# Altium PCB PCB1.PcbDoc (part 2 of 3)
Units mm, origin at the board's own origin, x right, y up, seen from the top; angles counter-clockwise.
Board outline 395.86 x 234.82 mm, 2 copper layers (Top Layer, Bottom Layer); 284 components, 215 nets, 949 pads, 803 vias.
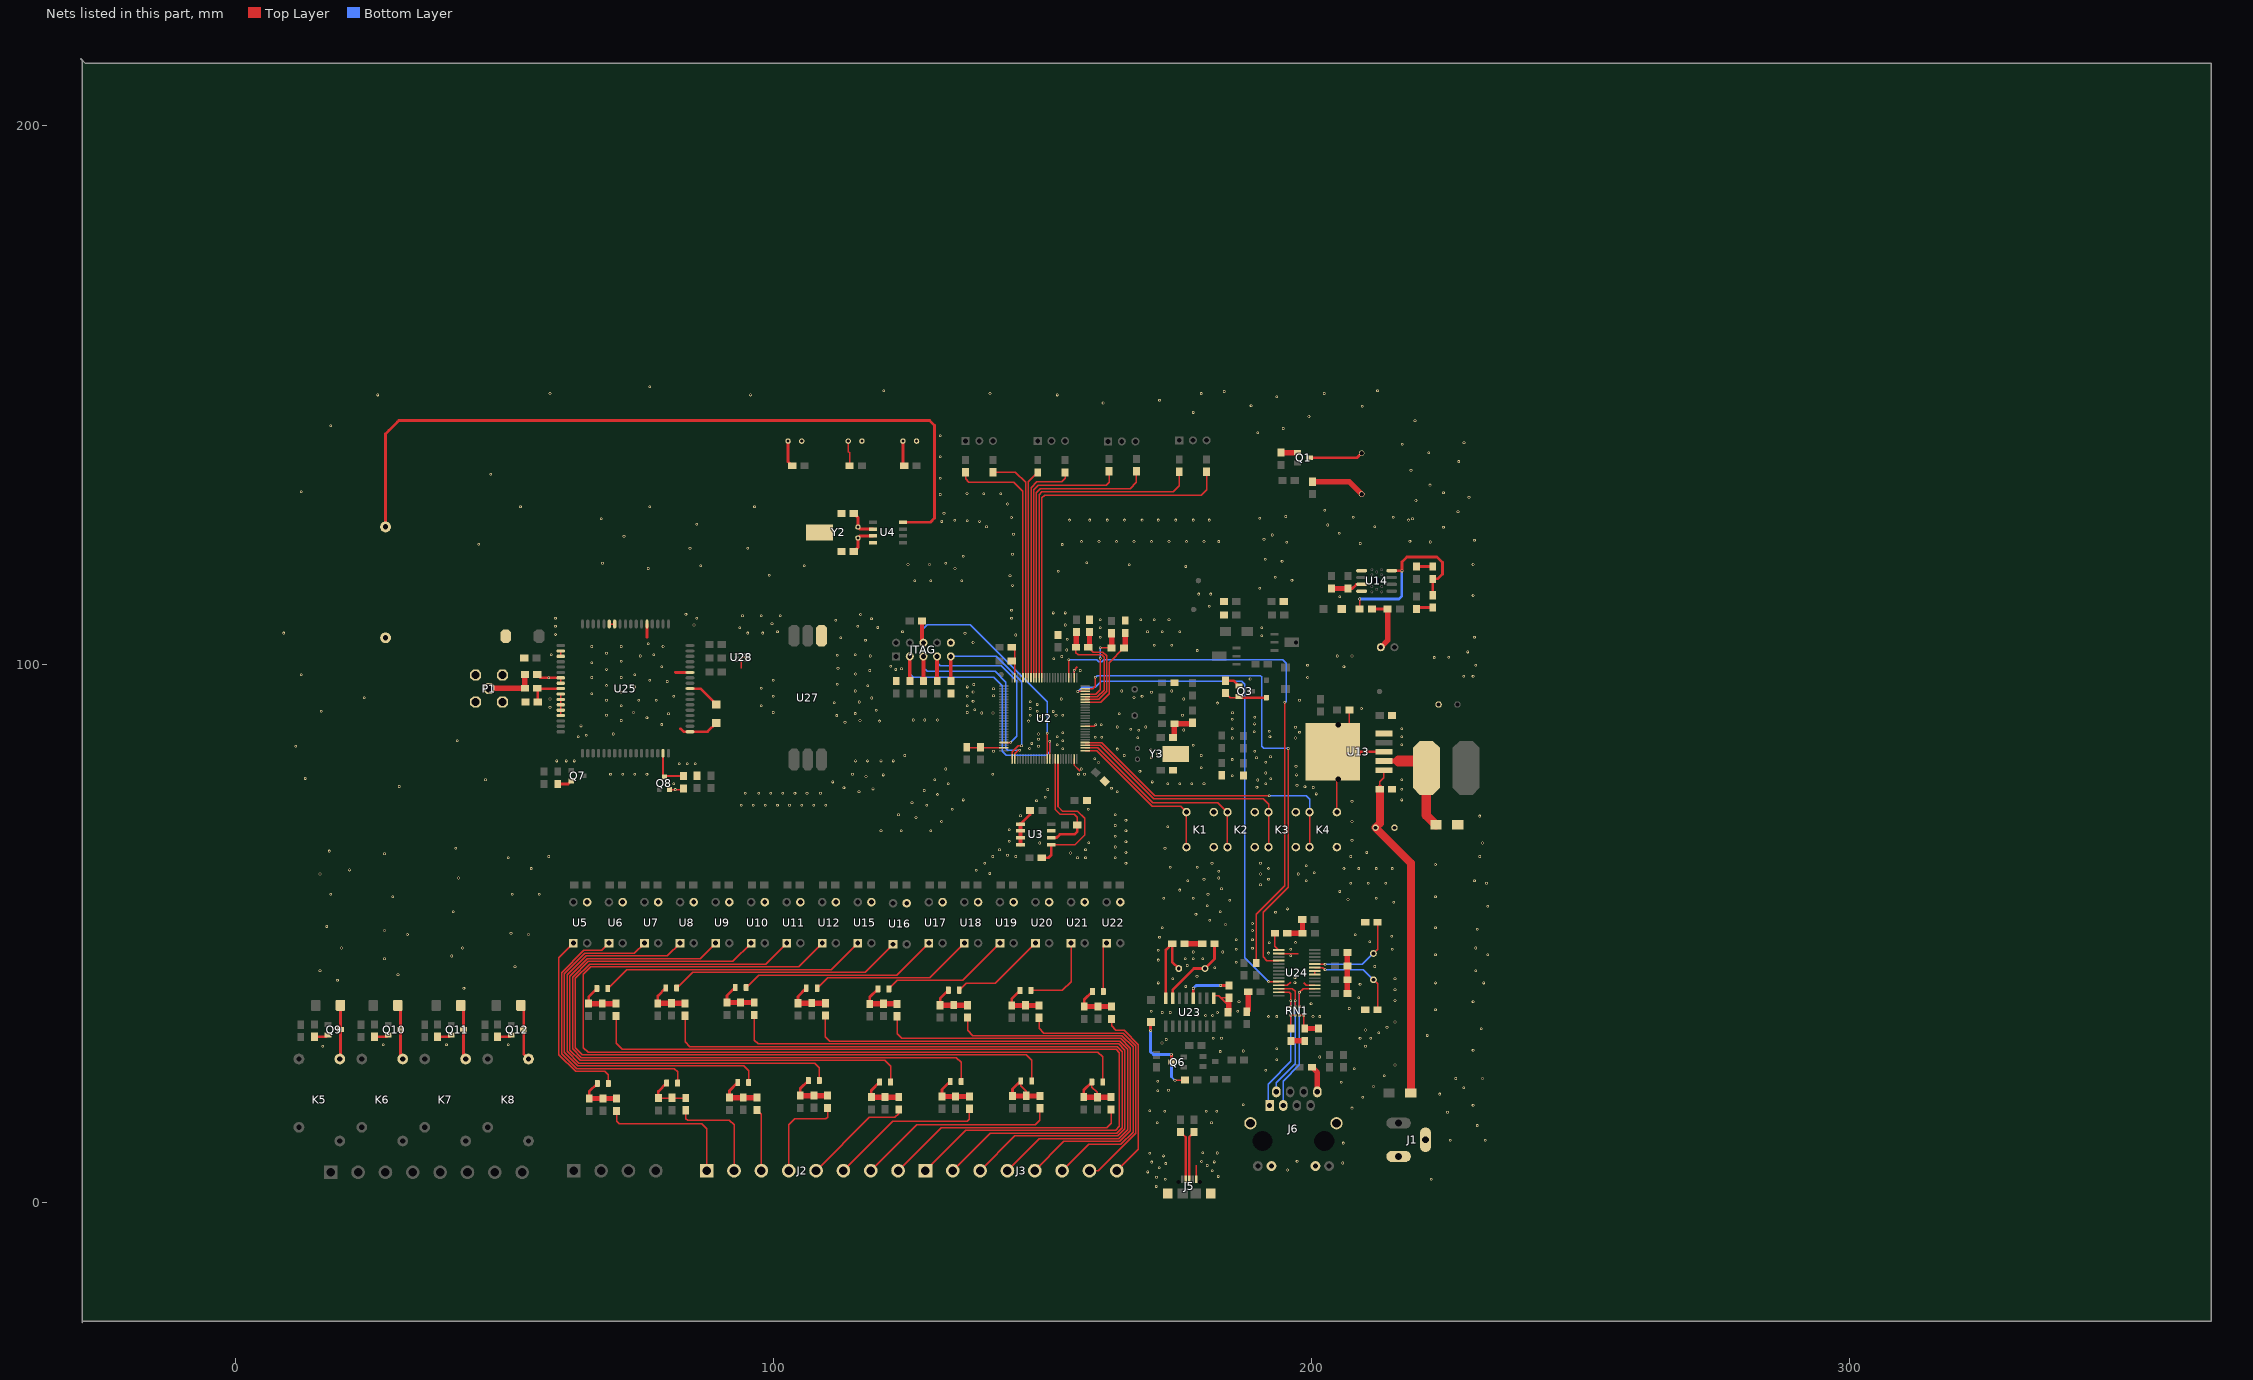
[diagram p2: the nets of this part, all layers, seen from the top]

## Via types
v1: diameter 0.5, hole 0.3, Top Layer to Bottom Layer, tented both sides, 771 vias
v2: diameter 0.7, hole 0.5, Top Layer to Bottom Layer, tented both sides, 29 vias
v3: diameter 1, hole 0.7, Top Layer to Bottom Layer, tented both sides, 3 vias

## Nets (pads, with @x,y where several pads share a name; then routed paths per layer and width w, separated by ;. In a path a pad name is that pad's centre, name@x,y a point inside that pad or via, vN(x,y) a via of type N, cw(c..) or ccw(c..) an arc to the next point about the centre after c; other vN are vias at no path point) (continued)
GND: BAT1.2 C1.2 C2.2 C3.1 C4.1 C7.1 C9.2 C10.2 C11.1 C12.1 C13.2 C14.1 C15.2 C16.2 C17.2 C18.1 C19.2 C20.1 C21.1 C22.2 C23.1 C24.2 C25.2 C26.2 C27.2 C28.2 C29.2 C30.1 C31.1 C32.1 C33.2 C34.1 C35.2 C36.2 C37.2 C38.2 C39.1 C40.2 C41.2 C42.2 C43.2 C65.2 C66.2 C67.2 C68.2 C69.1 C70.1 C71.1 C72.1 C73.1 D12.1 D25.2 D26.2 D27.2 J1.2 J1.3 J4.2 J5.0@173.252,1.624 J5.0@181.252,1.624 J5.5 J6.8 J6.10 J6.11 J6.13 J6.14 JTAG.10 K1.1 K2.1 K3.1 K4.1 L1.1 L4.1 LED5.2 P1.2 P1.3 P1.4 P1.5 Q1.1 Q3.1 Q7.1 Q8.1 Q9.2 Q10.2 Q11.2 Q12.2 R2.2 R6.2 R8.1 R9.2 R21.1 R52.2 R53.2 R73.1 R82.1 R83.1 R90.2 R92.1 R93.1 U2.10 U2.27 U2.49 U2.74 U2.99 U3.1 U3.2 U3.3 U3.4 U3.7 U4.4 U5.3 U6.3 U7.3 U8.3 U9.3 U10.3 U11.3 U12.3 U13.3 U13.5 U13.6 U13.7 U13.8 U14.1 U14.3 U15.3 U16.3 U17.3 U18.3 U19.3 U20.3 U21.3 U22.3 U23.1 U24.2 U24.11 U24.18 U24.21 U24.22 U25.18 U25.29 U25.39 U25.45 U25.46 U25.53 U25.54 U25.58 U25.59 U25.61 U25.62 U25.63 U25.64 U25.65 U27.3 U28.2 Y2.3 Y3.3 | length 198.7
  Top Layer w0.254: U25.65@60.508,90.432 U25.64@60.508,91.432 U25.63@60.508,92.432 U25.62@60.508,93.432 U25.61@60.508,94.432 ; U25.59@60.508,96.432 60.503,96.432 60.503,97.432 U25.58@60.508,97.432 ; U25.54@60.508,101.432 U25.53@60.508,102.432 ; U25.46@69.508,107.432 U25.45@70.508,107.432 ; Q8.1@80.69,76.676 83.072,76.676 C32.1@83.296,76.9 C32.1@83.488,76.9 ; U25.18@84.506,87.432 U25.18@84.508,87.432 ; 94,99.25 94,101 94.234,101.234 U28.2@94.98,101.234 ; U27.3@108.926,105.264 U27.3@108.926,105.283 ; C4.1@112.656,120.879 C4.1@112.656,120.884 ; R6.2@132.98,94.554 R6.2@132.994,94.554 ; C73.1@135.915,84.531 C73.1@136.003,84.619 ; C72.1@144.272,103.124 144.868,102.528 U2.49@144.868,97.466 ; U2.27@155.868,97.466 v1(155.868,98.868) 156.5,99.5 ; C7.1@177.848,89.091 C7.1@178.304,89.091 ; J5.5@178.552,4.42 J5.5@178.552,4.299 178.552,6.901 ; U23.1@181.797,37.892 181.797,38.329 182.779,38.329 183.107,38 ; 184.531,36.576 183.864,37.244 183.107,38 ; C39.1@184.62,38 183.107,38 ; C31.1@187.86,35.292 C31.1@187.96,35.392 ; U24.11@193.916,40.312 195.512,40.312 196.1,40.9 ; U24.2@193.916,46.214 197.486,46.214 ; 198.5,40.8 198.988,40.312 U24.18@200.616,40.312 ; U24.21@200.616,42.314 U24.22@200.616,42.964 ; K4.1@204.688,72.484 204.688,78.303 U13.6@204.978,78.593 ; U13.8@204.978,88.753 204.978,86.724 203.928,85.674 U13.7@203.928,83.692 ; LED5.2@207.01,91.44 207.01,83.692 U13.7@203.932,83.692 ; U13.7@207.4,81.2 207.4,81.204 207.391,81.195 207.391,81.006 207.003,80.617 U13.6@204.978,78.593 ; 209.05,83.15 209.05,83.688 209.05,83.692 209.05,83.794 210.13,83.794 210.236,83.688 211.607,83.688 ; U13.7@203.928,83.692 U13.7@203.932,83.692 ; U13.7@203.928,83.692 203.928,79.642 U13.6@204.978,78.593 ; U13.7@203.928,83.692 U13.7@203.932,83.692 ; 211.607,83.688 U13.3@213.428,83.688 211.607,83.688 ; U14.3@209.296,114.808 209.55,114.808 U14.3@209.296,114.808
  Top Layer w0.3: C73.1@135.915,84.531 136.031,84.416 U2.74@142.818,84.416 ; U2.99@155.868,82.366 155.868,81.232 156.9,80.2 ; U2.10@157.918,88.416 159.616,88.416 v1(159.9,88.7)
  Top Layer w0.5: C65.2@14.732,30.734 16.891,30.734 Q9.2@17.272,31.115 ; C66.2@25.908,30.734 28.067,30.734 Q10.2@28.448,31.115 ; C67.2@37.592,30.734 39.751,30.734 Q11.2@40.132,31.115 ; C68.2@48.768,30.734 50.927,30.734 Q12.2@51.308,31.115 ; C33.2@56.118,98.044 56.73,97.432 60.503,97.432 U25.58@60.508,97.432 ; R92.1@59.928,77.724 61.862,77.724 Q7.1@62.436,78.298 ; 76.5,105 76.508,105.008 U25.39@76.508,107.432 ; 81.75,98.5 81.818,98.432 U25.29@84.508,98.432 ; 82.75,88 83.318,87.432 U25.18@84.508,87.432 87.797,87.432 C35.2@89.392,89.027 ; U3.1@145.924,70.27 147.702,72.048 C9.2@147.702,72.81 ; R83.1@183.98,96.906 185.504,96.906 Q3.1@186.52,95.89 ; U13.7@203.932,83.692 203.932,83.688 209.05,83.688 210.236,83.688 211.607,83.688 U13.3@213.428,83.688 ; R53.2@206.756,114.046 207.546,114.046 208.308,114.808 U14.3@209.296,114.808 ; C15.2@211.201,110.236 C16.2@214.122,110.236
  Top Layer w0.7: U3.4@145.924,66.46 U3.3@145.924,67.73 U3.2@145.924,69 U3.1@145.924,70.27
  Top Layer w1: C12.1@174.244,86.36 174.498,86.614 C1.2@174.498,88.9 177.657,88.9 C7.1@177.848,89.091 ; C34.1@176.38,48.044 C40.2@179.682,48.044 ; C30.1@184.464,35.292 184.62,35.448 184.62,36.576 C39.1@184.62,38 ; C31.1@187.96,35.392 188.214,35.646 R90.2@188.214,39.116 ; R21.1@194.32,139.276 Q1.1@197.368,139.276 ; C29.2@195.478,49.984 C25.2@198.314,49.984 198.314,52.482 C23.1@198.272,52.524 ; C41.2@196.18,29.99 C42.2@198.72,29.99 ; C43.2@200.05,25.092 201.066,24.076 J6.8@201.066,20.52 ; R52.2@203.708,114.046 R53.2@206.756,114.046 ; C26.2@206.654,38.808 C19.2@206.654,41.348 C22.2@206.654,43.888 C24.2@206.654,46.428 ; J4.2@212.852,103.124 214.122,104.394 C16.2@214.122,110.236
  Bottom Layer w0.254: 155.868,98.118 v1(155.868,98.868) ; J1.2@216.154,8.509 J1.2@217.094,8.509 ; J1.3@220.194,11.609 J1.3@221.154,11.609
  other v1: 171.12,2.946 222.25,4.25 172.796,4.267 171.171,4.648 182.626,4.801 169.545,5.639 181.534,5.867 195.5,6 171.679,6.401 180.594,6.833 172.898,7.188 205.8,7.3 170.282,7.468 181.915,7.493 179.553,7.569 197.3,7.6 172.466,8.611 169.951,9.093 182.474,9.144 179.756,9.22 205.9,11 225.75,11.5 232.25,11.5 230.75,14.25 171.3,14.8 181.4,14.8 225.25,16.75 172.7,16.9 180.4,16.9 182.4,16.9 169.9,17 207.5,17.5 230,18 187.3,18.1 209.5,19.5 223.8,20.1 171.4,20.7 173.4,20.8 228.25,21.25 211.5,21.5 205.5,22.3 171.4,22.5 226.75,23 231.75,23 213.5,23.5 191.5,24.5 207.9,24.8 215.5,25.5 193.5,26.5 201.5,27 183,28 187.3,28.1 230,28.25 193.5,28.5 16.25,29 210,29 27.5,29.25 39.25,29.25 50.75,29.25 172.2,29.6 173,30.25 181.75,30.5 183.25,30.5 209,30.5 211,30.5 221.5,31 212.5,31.5 210,32 231.5,32.25 214,32.5 215.5,33.5 192,34.5 193.5,34.5 200.25,34.5 201.5,34.5 178.9,34.7 180.3,34.7 181.6,34.7 172.25,35.25 173.75,35.25 182.5,35.25 170.2,35.5 186.25,35.5 223,35.75 207,36 199.9,36.9 186.5,37.25 230,37.25 215.5,37.5 208.75,38 215.5,39.5 42.5,39.75 176.6,40.1 209,40.5 171.5,40.75 223,40.75 232,40.75 196.9,40.8 19,41.25 174.2,41.5 215.5,41.5 196.9,41.7 178.7,42 30.25,42.25 15.75,43 230.5,43 182,43.6 52,43.75 211.7,43.8 176.9,44 186,44.6 171.5,45 27.75,45.25 176.5,45.25 178,45.25 179.75,45.25 40.25,45.75 196.1,45.8 223,46 232.75,46 192,46.3 178,46.5 183.5,46.5 171.5,46.8 186,47 196.1,47 215,47 189,47.2 19.75,47.25 42.25,47.25 230.5,47.25 192.1,48.2 197,48.25 210.8,48.4 186,48.8 189,48.8 171.75,49.25 214.9,49.4 208.1,49.7 32,49.75 54.5,49.75 51.25,50 27.75,50.5 189,50.5 230.75,50.75 172.25,51 223,51 17,51.25 184,51.6 189,51.8 181.1,52.4 178.5,53.5 193.3,53.9 40.5,54 183,54 195.5,54.5 232.75,55 180.6,55.1 215.25,55.75 184.8,56.1 206.75,56.25 172.5,56.5 178,56.5 212,56.5 29.25,56.75 223,56.75 17.75,57.25 51.5,57.25 56.5,57.25 180.75,57.25 205.25,57.75 175.5,58 183.25,58.25 190.5,59 207.25,59.25 210.5,59.25 213.75,59.25 232.5,59.25 177,59.75 199,59.75 230.25,59.75 180,60 192,60 41.5,60.25 182.75,60.25 15.75,61 190.5,61 197.5,61 140.2,61.1 200.5,61.25 182.75,61.5 137.7,61.7 21.25,61.75 55,62 192,62 206,62 208.75,62 212,62 215,62 173.75,62.25 178.75,62.25 199,62.5 223,62.75 139.25,63 165.5,63 181.5,63 190.5,63 50.75,64 156.5,64 158,64 163.5,64 58.25,64.25 140.75,64.25 145,64.25 207.25,64.25 231.25,64.25 143.5,64.5 27.75,64.75 155.2,64.9 165.5,65 210.25,65 17.5,65.25 142,65.5 158,65.5 41,65.75 172.75,65.75 163.5,66 149.5,66.75 231.75,66.75 158.6,66.8 165.5,67 143.8,67.1 207.5,67.25 149.5,68 163.5,68 120,69 123.75,69 129.25,69 165.5,69 143.8,69.2 173.25,69.75 163.5,70 131.25,70.75 207.5,70.75 165.5,71 126.5,71.5 231.25,71.75 145.9,71.8 123.25,72 163.5,72 133.25,73 158.5,73 94,73.75 96.25,73.75 98.5,73.75 100.75,73.75 103,73.75 105.25,73.75 107.5,73.75 109.75,73.75 128.5,73.75 125.75,74.25 207.5,74.5 148.9,74.6 135.25,74.75 216.75,74.75 150.5,75.25 130.5,75.75 200.838,75.87 94.75,76 97.25,76 99.5,76 101.75,76 104,76 106.25,76 108.75,76 115.9,76.3 163.9,76.3 128,76.5 81.75,76.676 151,76.7 216.75,76.75 118.5,76.8 162.8,76.9 113.1,77 200.304,77.064 189.84,77.089 198.755,77.191 30.5,77.25 197.282,77.47 81.5,77.75 132.5,77.75 173.25,77.75 175.5,77.75 177.75,77.75 180,77.75 191.5,77.75 111,78.1 170.4,78.1 190.017,78.461 46.5,78.5 130,78.5 216.75,78.5 192.43,78.664 13,78.75 117.2,79.1 185.25,79.25 120.4,79.4 197.18,79.4 69.75,79.5 72,79.5 74.25,79.5 76.5,79.5 114.7,79.5 140.75,79.5 156.7,79.5 157.8,79.5 191.5,79.75 168.1,80.1 132,80.5 157.2,80.5 179.5,80.75 197.104,81.001 82.5,81.5 84,81.5 85.5,81.5 160.4,81.7 191.5,81.75 59.75,82 61.5,82 63,82 115.25,82 117.5,82 120,82 122.25,82 185.25,82.25 159.7,82.4 189.763,82.575 170.2,82.6 192.354,82.779 124.4,83 165.2,83 179.5,83 171.3,83.3 140.9,83.8 189.408,83.795 170.1,84.1 163.9,84.2 153.75,84.25 147.6,84.3 11.25,84.75 149.25,84.75 178,84.9 152.75,85 216.75,85 148,85.25 41.25,85.75 153.75,85.75 149.25,86 185.25,86.25 197,86.25 167.7,86.3 159.8,86.4 161,86.4 63.75,86.5 152.75,86.5 192.25,86.5 216.75,86.5 65.25,86.75 70.25,87 149.25,87 153.75,87.25 197.764,87.351 189.357,87.401 192.1,87.503 167.9,87.7 176.25,87.75 166.4,87.9 185.25,88 216.75,88 197,88.25 163.9,88.3 169.2,88.3 64.25,88.5 160.9,88.7 79.25,88.75 189.382,88.875 113.3,89.2 119.7,89.4 147.4,89.4 71.75,89.5 116.1,89.5 126,89.6 128.1,89.6 130.5,89.6 185.25,89.75 76.5,90 189.408,90.094 149.6,90.3 111.76,90.424 69,90.5 147.75,90.5 152.5,90.5 153.75,90.5 176,90.5 80.5,90.75 164.25,90.75 115.2,90.8 138.7,90.9 140.8,90.9 185.293,90.932 74,91 100,91 136,91 152,91.2 16,91.25 149,91.25 119.101,91.44 137.4,91.5 147.75,91.75 209.25,91.75 58.5,92 71.75,92.25 97.75,92.25 136,92.25 149,92.5 182.5,92.75 111.3,92.8 115.951,92.939 147.75,93 137.1,93.1 69,93.25 75,93.25 78.25,93.25 197.75,93.25 58.5,93.5 153.5,93.5 176.25,93.5 118.3,93.7 24,93.75 167,93.8 81.5,94 100,94 136,94 168.5,94 140.9,94.1 66.25,94.5 71.75,94.75 170.25,94.75 137.1,94.8 115.2,95 164.75,95 174,95 140.9,95.4 97.75,95.5 74.25,95.75 136,95.75 117.526,95.987 69,96 137.2,96.2 111.862,96.241 80.25,96.75 77,97 100,97 188.567,97.212 58.25,97.432 66.25,97.5 71.75,97.5 199.25,97.5 228.25,97.75 230,97.75 12.25,98 74.25,98 115.265,98.146 117.9,98.8 157,98.8 69,99 122.75,99 123.8,99.1 112,99.2 79.25,99.5 206,99.5 121.8,99.6 199.25,99.75 230.5,99.75 66.25,100.25 71.75,100.5 152.1,101 222.8,101.2 225.5,101.25 153.6,101.4 75.25,101.5 118,101.5 204.75,101.5 207.5,101.5 111.862,101.651 115.189,101.702 58.75,101.75 77.75,101.75 69,102 229,102.25 178.75,102.5 154.5,102.6 66.25,103.25 71.75,103.25 79.5,103.25 170.75,103.5 174,103.5 76.75,103.75 137.1,104 117.1,104.4 154.6,104.6 112.5,104.9 160.75,105 230.25,105 190.75,105.25 145,105.4 59.5,105.5 135.6,105.7 9,105.75 95.25,105.75 98,105.75 100.75,106 124,106 169.5,106 172.25,106 175.5,106 93.75,106.75 160.75,106.75 190.75,106.75 119.4,106.8 59.5,107 115.672,107.036 85.25,107.25 154.25,107.25 99.75,107.5 111.582,108.153 160.75,108.25 168.25,108.25 170.75,108.25 173.5,108.25 118.212,108.433 59.5,108.5 85.75,108.5 144.25,108.5 94.25,109 97.75,109 101.25,109 116.2,109.2 83.75,109.25 152,109.5 154.25,109.5 144.25,110 181,110.75 205.25,112.5 230,112.75 179,113 181.25,113 190.373,114.097 144.424,114.605 126.25,115.5 129.25,115.5 135,115.5 196.342,115.595 193.218,116.129 143.967,116.408 99.25,116.5 152.933,117.221 76.75,117.75 133.75,117.75 176.632,118.135 86.5,118.25 105.75,118.25 166.091,118.44 125,118.5 129,118.5 230,118.5 68.25,118.75 132,118.75 158.191,118.796 194.513,119.101 191.364,119.456 135.25,120 144.424,120.371 84.5,121.5 95.25,121.5 153.645,122.199 45.25,122.25 209.042,122.403 195.351,122.657 222.021,122.682 157.25,122.75 160.5,122.75 163.75,122.75 167,122.75 170.25,122.75 173.5,122.75 176.75,122.75 180,122.75 182.75,122.75 218.262,122.834 230.25,123 191.16,123.19 72.25,123.75 192.659,123.977 144.602,124.104 205.13,124.308 224.485,125.4 139.6,125.5 211.75,125.5 202.971,125.832 85.75,126 131.3,126.5 138.3,126.5 136,126.6 133.7,126.7 155,126.75 158.75,126.75 162,126.75 165.25,126.75 168.5,126.75 171.5,126.75 174.75,126.75 178,126.75 181,126.75 218,126.75 218,126.75 68,127 218.75,127 190.348,127.076 144.221,127.229 215.189,127.254 207.747,127.279 195.199,127.406 131.7,128 227.203,128.27 202.413,128.6 53,129.25 77,129.25 96.5,129.25 143.51,129.743 219.38,130.378 229.25,131 131,131.5 139.065,131.623 142.24,131.623 135.966,131.699 224.485,131.826 12.25,132 222,133.25 131,134.5 47.5,135.25 218.465,136.017 227.355,137.617 131,138.5 221.75,139.25 216.84,140.843 228.321,141.122 131,142.4 190,143 194.742,143.764 17.75,144.25 219.202,145.186 199.5,146 178,146.75 209.423,147.879 188.75,148 161.25,148.5 171.75,149 193.523,149.682 26.5,150 95.75,150 152.75,150 58.5,150.25 140.25,150.25 179.5,150.25 202.336,150.266 183.744,150.647 120.5,150.75 212.25,150.75 77,151.5
I2C1_SCL: R23.1 U2.92 U3.6 | length 22
  Top Layer w0.3: U2.92@152.368,82.366 152.368,72.981 153.238,72.111 155.88,72.111 156.464,71.526 R23.1@156.464,70.104
  Top Layer w0.5: U3.6@151.624,67.73 152.617,67.73 153.238,68.351 155.931,68.351 156.464,68.885 R23.1@156.464,70.104
I2C1_SDA: R24.1 U2.93 U3.5 | length 28.7
  Top Layer w0.3: U3.5@151.624,66.46 156.071,66.46 157.861,68.25 157.861,71.323 156.515,72.669 153.721,72.669 152.868,73.522 U2.93@152.868,82.366
  Top Layer w0.5: R24.1@149.86,64.008 151.105,64.008 151.624,64.527 U3.5@151.624,66.46
IN1: J2.1 R25.1 | length 27
  Top Layer w0.254: R25.1@70.86,16.984 70.86,15.065 71.375,14.55 86.725,14.55 87.604,13.671 J2.1@87.604,5.87
IN2: J2.2 R26.1 | length 19.5
  Top Layer w0.254: R26.1@83.712,17.1 83.712,15.563 84.05,15.225 91.825,15.225 92.684,14.366 J2.2@92.684,5.87
IN3: J2.3 R27.1 | length 11.6
  Top Layer w0.254: R27.1@96.924,17.16 97.764,16.32 J2.3@97.764,5.87
IN4: J2.4 R28.1 | length 18
  Top Layer w0.254: J2.4@102.844,5.87 102.844,14.394 103.925,15.475 109.7,15.475 110.064,15.839 R28.1@110.064,17.536
IN5: J2.5 R29.1 | length 20.5
  Top Layer w0.254: J2.5@107.924,5.87 117.838,15.784 122.58,15.784 123.284,16.488 R29.1@123.284,17.26
IN6: J2.6 R30.1 | length 29.3
  Top Layer w0.254: J2.6@113.004,5.87 122.209,15.075 136.025,15.075 136.404,15.454 R30.1@136.404,17.36
IN7: J2.7 R31.1 | length 37.6
  Top Layer w0.254: J2.7@118.084,5.87 126.598,14.384 148.696,14.384 149.512,15.2 R31.1@149.512,17.468
IN8: J2.8 R32.1 | length 45.8
  Top Layer w0.254: J2.8@123.164,5.87 131.17,13.876 161.904,13.876 162.728,14.7 R32.1@162.728,17.26
IN9: J3.1 R54.1 | length 152.5
  Top Layer w0.254: R54.1@70.756,34.62 70.756,29.544 71.9,28.4 163.7,28.4 164.3,27.8 164.3,14.1 163.568,13.368 135.742,13.368 J3.1@128.244,5.87
IN10: J3.2 R55.1 | length 135.7
  Top Layer w0.254: R55.1@83.604,34.668 83.604,29.796 84.492,28.908 163.91,28.908 164.808,28.01 164.808,13.89 163.778,12.86 140.314,12.86 J3.2@133.324,5.87
IN11: J3.3 R56.1 | length 119
  Top Layer w0.254: R56.1@96.456,34.82 96.456,30.144 97.184,29.416 164.121,29.416 165.316,28.221 165.316,13.679 163.989,12.352 144.886,12.352 J3.3@138.404,5.87
IN12: J3.4 R57.1 | length 101.5
  Top Layer w0.254: R57.1@109.656,34.688 109.656,30.744 110.476,29.924 164.331,29.924 165.824,28.431 165.824,13.469 164.155,11.8 149.414,11.8 J3.4@143.484,5.87
IN13: J3.5 R58.1 | length 83.9
  Top Layer w0.254: R58.1@122.98,34.568 122.98,31.32 123.868,30.432 164.542,30.432 166.332,28.642 166.332,13.258 164.366,11.292 153.986,11.292 J3.5@148.564,5.87
IN14: J3.6 R59.1 | length 66.4
  Top Layer w0.254: R59.1@136.064,34.32 136.064,31.936 137.06,30.94 164.752,30.94 166.84,28.852 166.84,13.048 164.576,10.784 158.558,10.784 J3.6@153.644,5.87
IN15: J3.7 R60.1 | length 49
  Top Layer w0.254: R60.1@149.376,34.276 149.376,32.324 150.252,31.448 164.962,31.448 167.348,29.063 167.348,12.837 160.38,5.87 J3.7@158.724,5.87
IN16: J3.8 R61.1 | length 32.8
  Top Layer w0.254: R61.1@162.832,34.076 162.832,32.768 163.644,31.956 165.173,31.956 167.825,29.304 167.825,9.891 J3.8@163.804,5.87
JDQOUT1: D28.1 K5.3 Q9.3 | length 10.4
  Top Layer w0.5: K5.3@19.448,26.624 19.558,26.734 Q9.3@19.558,32.067 D28.1@19.558,36.576
  Top Layer w1: K5.3@19.448,26.624 K5.3@19.722,26.898
JDQOUT2: D29.1 K6.3 Q10.3 | length 10.3
  Top Layer w0.5: D29.1@30.226,36.576 30.734,36.068 Q10.3@30.734,32.067 30.734,27.022 K6.3@31.132,26.624
JDQOUT3: D30.1 K7.3 Q11.3 | length 10.3
  Top Layer w0.5: D30.1@41.91,36.576 42.418,36.068 Q11.3@42.418,32.067 42.418,27.022 K7.3@42.816,26.624
JDQOUT4: D31.1 K8.3 Q12.3 | length 10.5
  Top Layer w0.5: D31.1@53.086,36.576 53.594,36.068 Q12.3@53.594,32.067 53.594,27.53 K8.3@54.5,26.624
JTCK: JTAG.9 R6.1 U2.76 | length 35.5
  Top Layer w0.254: U2.76@144.368,82.762 U2.76@144.368,82.366 144.368,83.662 145.506,84.8 v1(146.1,84.8)
  Top Layer w0.7: JTAG.9@132.96,101.42 132.96,96.86 R6.1@132.98,96.84
  Bottom Layer w0.254: JTAG.9@132.96,101.42 141.429,101.42 146.1,96.749 v1(146.1,84.8)
JTDI: JTAG.5 R4.2 U2.77 | length 40.2
  Top Layer w0.254: U2.77@144.868,82.366 144.868,83.349 145.491,83.972 v1(145.745,83.972)
  Top Layer w0.7: JTAG.5@127.88,101.42 127.88,96.854 R4.2@127.9,96.834
  Bottom Layer w0.254: JTAG.5@127.88,101.42 127.88,99.323 128.575,98.628 141.173,98.628 143.18,96.622 143.18,84.353 143.561,83.972 v1(145.745,83.972)
JTDO: JTAG.6 R22.2 U2.89 | length 46.6
  Top Layer w0.254: U2.89@150.868,82.366 v1(150.868,87.13)
  Top Layer w0.7: R22.2@127.626,108.024 127.626,104.214 JTAG.6@127.88,103.96
  Bottom Layer w0.254: JTAG.6@127.88,103.96 127.88,106.544 128.626,107.29 136.576,107.29 150.868,92.997 v1(150.868,87.13)
JTMS: JTAG.7 R5.2 U2.72 | length 35.1
  Top Layer w0.254: U2.72@142.818,85.416 v1@144.12,85.416
  Top Layer w0.7: JTAG.7@130.42,101.42 130.42,96.854 R5.2@130.44,96.834
  Bottom Layer w0.254: JTAG.7@130.42,101.42 130.42,100.237 130.988,99.67 142.367,99.67 145.212,96.825 145.212,86.538 v1(144.12,85.446)
JTRST: JTAG.3 R3.2 U2.90 | length 52.7
  Top Layer w0.254: U2.90@151.368,82.366 v1(151.368,85.639)
  Top Layer w0.7: JTAG.3@125.34,101.42 125.34,96.854 R3.2@125.36,96.834
  Bottom Layer w0.254: JTAG.3@125.34,101.42 125.34,98.155 125.959,97.536 140.894,97.536 142.494,95.936 142.494,83.82 143.281,83.033 150.673,83.033 151.368,83.728 v1(151.368,85.639)
KEY0: K1.2 U2.1 | length 30.4
  Top Layer w0.254: U2.1@158.242,83.916 U2.1@157.918,83.916 160.034,83.916 170.4,73.55 175.682,73.55 K1.2@176.748,72.484 K1.2@176.748,65.984
KEY1: K2.2 U2.2 | length 37.9
  Top Layer w0.254: U2.2@157.918,84.416 160.309,84.416 170.475,74.25 182.602,74.25 K2.2@184.368,72.484 K2.2@184.368,65.984
KEY2: K3.2 U2.3 | length 46.6
  Top Layer w0.254: U2.3@157.918,84.916 160.734,84.916 170.7,74.95 190.975,74.95 191.988,73.937 K3.2@191.988,72.484 K3.2@191.988,65.984
KEY3: K4.2 U2.4 | length 55
  Top Layer w0.254: U2.4@157.918,85.416 160.984,85.416 170.875,75.525 v1(192.125,75.525) ; K4.2@199.608,65.984 K4.2@199.608,72.484
  Bottom Layer w0.254: v1(192.125,75.525) 198.975,75.525 199.608,74.892 K4.2@199.608,72.484
LED0_0: R10.2 U2.39 | length 68
  Top Layer w0.254: U2.39@149.868,97.466 149.868,130.868 150.4,131.4 179.48,131.4 180.48,132.4 R10.2@180.48,135.726
LED0_1: R11.2 U2.40 | length 63.3
  Top Layer w0.254: U2.40@149.368,97.466 149.368,131.468 149.9,132 174.3,132 175.4,133.1 R11.2@175.4,135.726
LED1_0: R12.2 U2.41 | length 56.7
  Top Layer w0.254: U2.41@148.868,97.466 148.868,103.5 ; 148.868,104.319 148.868,103.5 ; R12.2@167.46,135.822 167.46,133.76 166.3,132.6 149.6,132.6 148.868,131.868 148.868,103.5
LED1_1: R13.2 U2.42 | length 57.6
  Top Layer w0.254: 148.368,103.549 U2.42@148.368,97.466 148.368,132.368 149.2,133.2 161.8,133.2 162.38,133.78 R13.2@162.38,135.822
LED2_0: R14.2 U2.43 | length 43.5
  Top Layer w0.254: U2.43@147.868,97.466 147.868,132.768 148.934,133.834 153.534,133.834 154.196,134.496 R14.2@154.196,135.606
LED2_1: R15.2 U2.44 | length 48.9
  Top Layer w0.254: 147.368,107.482 U2.44@147.368,97.466 147.368,133.858 R15.2@149.116,135.606
LED3_0: R16.2 U2.45 | length 49.3
  Top Layer w0.254: R16.2@140.796,135.626 144.974,135.626 146.868,133.732 U2.45@146.868,97.466 146.868,103.601
LED3_1: R17.2 U2.46 | length 47.5
  Top Layer w0.254: R17.2@135.716,135.626 135.716,134.384 136.3,133.8 144.7,133.8 146.368,132.132 U2.46@146.368,97.466
NET_CS: R94.2 U2.29 | length 102.3
  Top Layer w0.254: U2.29@154.868,97.466 v1(154.868,100.807) ; R94.2@189.7,44.45 189.7,53.505 195.021,58.826 v1(195.021,92.913)
  Bottom Layer w0.254: v1(154.868,100.807) 160.051,100.807 160.439,100.419 160.961,100.419 161.349,100.807 194.646,100.807 195.326,100.127 195.326,92.888
NET_INT: U2.24 U24.4 | length 96.6
  Top Layer w0.254: U2.24@157.918,95.416 159.348,95.416 159.817,95.885 v1(159.817,97.536) ; U24.4@193.916,44.914 191.686,44.914 191,45.6 191,53.917 195.656,58.573 v1(195.656,84.303)
  Bottom Layer w0.254: v1(159.817,97.536) 160.132,97.851 190.49,97.851 190.744,97.597 190.744,84.699 191.135,84.308 v1@195.575,84.308
NET_RST: U2.23 U24.10 | length 92.4
  Top Layer w0.254: v1@156.587,94.916 U2.23@157.918,94.916 ; v1(192,41) 192.014,41.014 U24.10@193.916,41.014
  Bottom Layer w0.254: v1(156.566,94.894) 157.353,95.682 159.788,95.682 160.942,96.835 187.035,96.835 187.579,96.291 187.579,45.421 v1(192,41)
NetBAT1_1: BAT1.1 U4.8 | length 146.4
  Top Layer w0.5: BAT1.1@27.94,125.476 27.94,142.773 28.554,143.388 ; 30.175,145.009 28.554,143.388 ; U4.8@124.086,126.345 129.164,126.345 129.921,127.102 129.921,144.348 129.032,145.237 30.404,145.237 28.554,143.388
NetBEEP1_1: BEEP1.1 R20.2 | length 10.1
  Top Layer w1: R20.2@200.152,133.858 207.01,133.858 BEEP1.1@209.296,131.572
NetBEEP1_2: BEEP1.2 Q1.3 | length 10
  Top Layer w0.5: Q1.3@199.654,138.324 208.448,138.324 BEEP1.2@209.296,139.172
NetC3_2: C3.2 U4.2 Y2.2 | length 5.8
  Top Layer w0.6: C3.2@114.942,127.996 115.704,127.234 Y2.2@115.704,125.456 116.085,125.075 U4.2@118.498,125.075
NetC4_2: C4.2 U4.3 Y2.1 | length 5.8
  Top Layer w0.6: C4.2@114.942,120.884 115.704,121.646 Y2.1@115.704,123.424 116.085,123.805 U4.3@118.498,123.805
NetC5_1: C5.1 L1.2 U2.20 | length 18.2
  Top Layer w0.254: U2.20@157.918,93.416 160.416,93.416 161.908,94.908 161.908,101.517 161.2,102.225 159.395,102.225 C5.1@158.496,103.124
  Top Layer w1: C5.1@158.496,103.124 158.732,103.36 L1.2@158.732,105.926
NetC5_2: C5.2 L2.2 U2.21 | length 19.6
  Top Layer w0.254: C5.2@156.21,103.124 156.21,102.1 156.61,101.7 160.975,101.7 161.425,101.25 161.425,95.125 160.216,93.916 U2.21@157.918,93.916
  Top Layer w1: C5.2@156.21,103.124 156.296,103.21 L2.2@156.296,105.942
NetC8_1: C8.1 L3.1 U2.22 | length 16.2
  Top Layer w0.254: U2.22@157.918,94.416 159.916,94.416 160.7,95.2 v1(160.7,101.05) ; v1(160.7,103) C8.1@162.84,103 ; C8.1@162.844,102.556 C8.1@162.844,102.996
  Top Layer w1: C8.1@162.844,102.996 L3.1@162.844,105.704
  Bottom Layer w0.254: v1(160.7,101.05) v1(160.7,103)
NetC8_2: C8.2 L4.2 U2.19 | length 17.7
  Top Layer w0.254: U2.19@157.918,92.916 160.81,92.916 162.416,94.522 162.416,100.282 C8.2@165.13,102.996 C8.2@165.384,103.25
  Top Layer w1: C8.2@165.384,103.25 L4.2@165.384,105.79
NetC13_1: C13.1 C14.2 D9.2 U13.1 | length 63.3
  Top Layer w0.254: C14.2@212.666,76.732 212.666,78.105 213.428,78.867 U13.1@213.428,80.288
  Top Layer w1.5: C14.2@212.666,76.732 212.666,70.37 C13.1@211.892,69.596 218.426,63.062 D9.2@218.426,20.32
NetC15_1: C15.1 D10.1 D11.1 R51.2 U14.4 U14.8 | length 34.1
  Top Layer w0.254: C15.1@208.915,110.115 v1(208.915,112.09)
  Top Layer w0.5: U14.8@214.884,117.348 216.752,117.348 v1(216.8,117.3) 216.8,119 217.7,119.9 223.3,119.9 224.3,118.9 224.3,116.7 223.424,115.824 D10.1@222.504,115.824 D11.1@222.504,112.776
  Bottom Layer w0.5: v1@208.9,112.1 216.2,112.1 216.752,112.652 v1@216.752,117.348
NetC20_2: C20.2 U24.24 Y4.2 | length 17.8
  Top Layer w0.254: U24.24@200.616,44.264 202.436,44.264 v1(202.5,44.2) ; Y4.2@211.48,46.228 212.242,46.99 C20.2@212.242,52.016
  Bottom Layer w0.254: v1(202.5,44.2) 209.452,44.2 Y4.2@211.48,46.228
NetC21_2: C21.2 U24.23 Y4.1 | length 17.7
  Top Layer w0.254: U24.23@200.616,43.614 202.086,43.614 v1(202.5,43.2) ; Y4.1@211.48,41.348 212.242,40.586 C21.2@212.242,35.76
  Bottom Layer w0.254: v1(202.5,43.2) 209.628,43.2 Y4.1@211.48,41.348
NetC29_1: C29.1 U24.1 | length 3.4
  Top Layer w0.254: C29.1@193.192,49.984 193.192,47.588 U24.1@193.916,46.864
NetC32_2: C32.2 Q8.3 U25.16 | length 8.1
  Top Layer w0.4: U25.16@79.508,83.432 79.508,79.258 Q8.3@79.74,79.026 79.9,79.186 C32.2@83.296,79.186
NetC33_1: C33.1 P1.1 R103.1 | length 9.2
  Top Layer w1: P1.1@47.172,95.448 47.228,95.504 R103.1@53.832,95.504 C33.1@53.832,98.044
NetC34_2: C34.2 U23.8 Y5.1 | length 15.8
  Top Layer w0.5: U23.8@172.907,37.892 172.907,46.857 C34.2@174.094,48.044 174.094,44.646 Y5.1@175.32,43.42
NetC35_1: C35.1 U25.26 | length 6.1
  Top Layer w0.5: U25.26@84.508,95.432 86.416,95.432 C35.1@89.392,92.456
NetC36_1: C36.1 R103.2 U25.60 | length 6.9
  Top Layer w0.254: R103.2@56.118,95.504 56.19,95.432 R103.2@56.2,95.422
  Top Layer w0.5: R103.2@56.19,95.432 U25.60@60.508,95.432 ; C36.1@56.2,92.964 R103.2@56.2,95.422
NetC39_2: C39.2 U23.4 | length 8.7
  Top Layer w0.5: U23.4@177.987,37.892 v1(177.987,39.709) ; v1(183.136,40.286) C39.2@184.62,40.286
  Bottom Layer w0.5: v1(177.987,39.709) 178.564,40.286 v1(183.136,40.286)
NetC40_1: C40.1 U23.7 Y5.2 | length 14.6
  Top Layer w0.5: U23.7@174.177,37.892 174.177,39.477 178.12,43.42 Y5.2@180.2,43.42 181.968,45.188 C40.1@181.968,48.044
NetC41_1: C41.1 RN1.1 RN1.3 | length 3.3
  Top Layer w0.254: C41.1@196.18,32.276 196.132,32.324 RN1.1@196.132,34.744 RN1.3@196.932,34.744
NetC42_1: C42.1 L6.1 RN1.5 RN1.7 | length 5.9
  Top Layer w0.254: RN1.5@197.732,34.744 RN1.7@198.532,34.744 198.532,32.464 C42.1@198.72,32.276
  Top Layer w1: C42.1@198.72,32.276 L6.1@201.26,32.276
NetC44_1: C44.1 D1.1 R25.2 R33.2 | length 8.5
  Top Layer w0.5: R33.2@65.78,19.27 65.78,20.54 D1.1@67.304,22.064
  Top Layer w1: R33.2@65.78,19.27 C44.1@68.32,19.27 ; C44.1@68.32,19.282 C44.1@68.32,19.27 ; R25.2@70.86,19.27 C44.1@68.32,19.27
NetC45_1: C45.1 D2.1 R26.2 R34.2 | length 8.6
  Top Layer w0.254: R34.2@78.632,19.346 C45.1@81.172,19.346 ; C45.1@81.172,19.4 C45.1@81.172,19.346 ; R26.2@83.712,19.386 83.672,19.346 C45.1@81.172,19.346
  Top Layer w0.5: R34.2@78.632,19.346 78.632,20.616 D2.1@80.156,22.14
NetC46_1: C46.1 D3.1 R27.2 R35.2 | length 8.5
  Top Layer w0.5: R35.2@91.844,19.446 91.844,20.716 D3.1@93.368,22.24
  Top Layer w1: R35.2@91.844,19.446 C46.1@94.384,19.446 ; C46.1@94.384,19.458 C46.1@94.384,19.446 ; R27.2@96.924,19.446 C46.1@94.384,19.446
NetC47_1: C47.1 D4.1 R28.2 R36.2 | length 8.5
  Top Layer w0.5: R36.2@104.984,19.822 104.984,21.092 D4.1@106.508,22.616
  Top Layer w1: R36.2@104.984,19.822 C47.1@107.524,19.822 ; C47.1@107.524,19.834 C47.1@107.524,19.822 ; R28.2@110.064,19.822 C47.1@107.524,19.822
NetC48_1: C48.1 D5.1 R29.2 R37.2 | length 8.5
  Top Layer w0.5: R37.2@118.204,19.546 118.204,20.816 D5.1@119.728,22.34
  Top Layer w1: R37.2@118.204,19.546 C48.1@120.744,19.546 ; C48.1@120.744,19.558 C48.1@120.744,19.546 ; R29.2@123.284,19.546 C48.1@120.744,19.546
NetC49_1: C49.1 D6.1 R30.2 R38.2 | length 8.5
  Top Layer w0.5: R38.2@131.324,19.646 131.324,20.916 D6.1@132.848,22.44
  Top Layer w1: R38.2@131.324,19.646 C49.1@133.864,19.646 ; C49.1@133.864,19.658 C49.1@133.864,19.646 ; R30.2@136.404,19.646 C49.1@133.864,19.646
NetC50_1: C50.1 D7.1 R31.2 R39.2 | length 11.7
  Top Layer w0.254: D7.1@145.956,22.548 145.956,21.666 146.972,20.65 C50.1@146.972,19.808
  Top Layer w0.5: R39.2@144.432,19.754 144.432,21.024 D7.1@145.956,22.548
  Top Layer w1: R39.2@144.432,19.754 146.972,19.754 R31.2@149.512,19.754
NetC51_1: C51.1 D8.1 R32.2 R40.2 | length 11.8
  Top Layer w0.254: D8.1@159.172,22.34 159.172,21.412 160.188,20.396 160.188,19.546 C51.1@160.188,19.5
  Top Layer w0.5: R40.2@157.648,19.546 157.648,20.816 D8.1@159.172,22.34
  Top Layer w1: R40.2@157.648,19.546 160.188,19.546 R32.2@162.728,19.546
NetC52_1: C52.1 D13.1 R54.2 R63.2 | length 8.5
  Top Layer w0.5: R63.2@65.676,36.906 65.676,38.176 D13.1@67.2,39.7
  Top Layer w1: R63.2@65.676,36.906 68.216,36.906 R54.2@70.756,36.906
NetC53_1: C53.1 D14.1 R55.2 R64.2 | length 8.5
  Top Layer w0.5: R64.2@78.524,36.954 78.524,38.316 D14.1@79.988,39.78
  Top Layer w1: R64.2@78.524,36.954 C53.1@81.064,36.954 ; C53.1@81.064,36.966 C53.1@81.064,36.954 ; R55.2@83.604,36.954 C53.1@81.064,36.954
NetC54_1: C54.1 D15.1 R56.2 R65.2 | length 8.5
  Top Layer w0.5: R65.2@91.376,37.106 91.376,38.376 D15.1@92.9,39.9
  Top Layer w1: R65.2@91.376,37.106 93.916,37.106 R56.2@96.456,37.106
NetC55_1: C55.1 D16.1 R57.2 R66.2 | length 8.5
  Top Layer w0.5: R66.2@104.576,36.974 104.576,38.244 D16.1@106.1,39.768
  Top Layer w1: R66.2@104.576,36.974 107.116,36.974 R57.2@109.656,36.974
NetC56_1: C56.1 D17.1 R58.2 R67.2 | length 8.5
  Top Layer w0.5: R67.2@117.9,36.854 117.9,38.124 D17.1@119.424,39.648
  Top Layer w1: R67.2@117.9,36.854 120.44,36.854 R58.2@122.98,36.854
NetC57_1: C57.1 D18.1 R59.2 R68.2 | length 8.5
  Top Layer w0.5: R68.2@130.984,36.606 130.984,37.876 D18.1@132.508,39.4
  Top Layer w1: R68.2@130.984,36.606 133.508,36.606 R59.2@136.064,36.606
NetC58_1: C58.1 D19.1 R60.2 R69.2 | length 8.5
  Top Layer w0.5: R69.2@144.296,36.562 144.296,37.832 D19.1@145.82,39.356
  Top Layer w1: R69.2@144.296,36.562 146.836,36.562 R60.2@149.376,36.562
NetC59_1: C59.1 D20.1 R61.2 R70.2 | length 8.5
  Top Layer w0.5: R70.2@157.752,36.362 157.752,37.632 D20.1@159.276,39.156
  Top Layer w1: R70.2@157.752,36.362 160.292,36.362 R61.2@162.832,36.362
NetD1_2: D1.2 U5.1 | length 34.2
  Top Layer w0.254: U5.1@62.844,48.148 60.144,45.448 60.144,27.427 63.235,24.336 68.7,24.336 69.336,23.7 D1.2@69.336,22.064
NetD2_2: D2.2 U6.1 | length 51.1
  Top Layer w0.254: U6.1@69.448,48.148 68.096,46.796 64.785,46.796 60.652,42.663 60.652,27.638 63.445,24.844 81.6,24.844 82.188,24.256 D2.2@82.188,22.14
NetD3_2: D3.2 U7.1 | length 69.7
  Top Layer w0.254: U7.1@76.052,48.148 74.192,46.288 64.996,46.288 61.16,42.452 61.16,27.848 63.656,25.352 94.463,25.352 95.4,24.415 D3.2@95.4,22.24
NetD4_2: D4.2 U8.1 | length 88.2
  Top Layer w0.254: U8.1@82.656,48.148 80.288,45.78 65.206,45.78 61.668,42.242 61.668,28.058 63.866,25.86 107.7,25.86 108.54,25.02 D4.2@108.54,22.616
NetD5_2: D5.2 U9.1 | length 107.2
  Top Layer w0.254: U9.1@89.26,48.148 86.384,45.272 65.417,45.272 62.176,42.031 62.176,28.269 64.077,26.368 120.7,26.368 121.76,25.308 D5.2@121.76,22.34
NetD6_2: D6.2 U10.1 | length 125.9
  Top Layer w0.254: U10.1@95.864,48.148 92.48,44.764 65.627,44.764 62.684,41.821 62.684,28.479 64.287,26.876 134,26.876 134.88,25.996 D6.2@134.88,22.44
NetD7_2: D7.2 U11.1 | length 144.5
  Top Layer w0.254: U11.1@102.468,48.148 98.576,44.256 65.838,44.256 63.192,41.61 63.192,28.69 64.498,27.384 147,27.384 147.988,26.396 D7.2@147.988,22.548
NetD8_2: D8.2 U12.1 | length 162.3
  Top Layer w0.254: U12.1@109.072,48.148 104.672,43.748 66.048,43.748 64.708,42.408 64.708,28.753 65.569,27.892 160.308,27.892 161.204,26.996 D8.2@161.204,22.34
NetD10_2: D10.2 R41.2 | length 3
  Top Layer w0.5: R41.2@219.456,118.11 D10.2@222.504,118.11
NetD11_2: D11.2 R42.1 | length 3.2
  Top Layer w0.5: R42.1@219.456,110.236 219.71,110.49 D11.2@222.504,110.49
NetD12_2: D12.2 L5.1 U13.2 | length 19.7
  Top Layer w1: U13.2@213.428,81.988 216.2,81.988
  Top Layer w1.7: L5.1@221.308,80.7 221.308,71.914 D12.2@223.094,70.128
  Top Layer w2: 216.2,81.988 220.02,81.988 L5.1@221.308,80.7
NetD13_2: D13.2 U15.1 | length 49.9
  Top Layer w0.254: D13.2@69.232,39.7 72.772,43.24 110.768,43.24 U15.1@115.676,48.148
NetD14_2: D14.2 U16.1 | length 43.6
  Top Layer w0.254: D14.2@82.02,39.78 84.972,42.732 117.024,42.732 U16.1@122.228,47.936
NetD15_2: D15.2 U17.1 | length 37.4
  Top Layer w0.254: D15.2@94.932,39.9 97.256,42.224 122.96,42.224 U17.1@128.884,48.148
NetD16_2: D16.2 U18.1 | length 30.8
  Top Layer w0.254: D16.2@108.132,39.768 110.08,41.716 129.056,41.716 U18.1@135.488,48.148
NetD17_2: D17.2 U19.1 | length 24.2
  Top Layer w0.254: D17.2@121.456,39.648 123.016,41.208 135.152,41.208 U19.1@142.092,48.148
NetD18_2: D18.2 U20.1 | length 17.8
  Top Layer w0.254: D18.2@134.54,39.4 135.84,40.7 141.248,40.7 U20.1@148.696,48.148
NetD19_2: D19.2 U21.1 | length 15.3
  Top Layer w0.254: D19.2@147.852,39.356 153.656,39.356 155.3,41 U21.1@155.3,48.148
NetD20_2: D20.2 U22.1 | length 9.2
  Top Layer w0.254: D20.2@161.308,39.156 161.308,47.552 U22.1@161.904,48.148
NetD22_1: D22.1 Q3.2 R83.2 | length 8.2
  Top Layer w0.254: R83.2@183.98,94.62 184.844,93.756 186.291,93.756 Q3.2@186.52,93.985
  Top Layer w0.5: Q3.2@186.52,93.985 186.749,93.756 D22.1@191.6,93.756
NetD24_2: D24.2 Q6.3 R89.1 | length 17.6
  Top Layer w0.254: v1(174.608,22.692) R89.1@176.456,22.692
  Top Layer w0.5: v1(170.078,31.928) 170.078,33.406 D24.2@170.18,33.508 ; Q6.3@173.954,26.036 v1(173.954,27.446)
  Bottom Layer w0.254: 173.954,23.346 v1(174.608,22.692)
  Bottom Layer w0.5: v1(170.078,31.928) 170.078,27.965 170.598,27.446 173.623,27.446 ; 173.954,23.346 v1(173.954,27.446)
NetD25_1: D25.1 R96.1 | length 4.7
  Top Layer w0.5: D25.1@124.062,141.424 124.062,137.102 R96.1@124.312,136.852
NetD26_1: D26.1 R88.1 | length 4.7
  Top Layer w0.254: D26.1@113.902,141.424 113.902,139.489 114.152,139.239 R88.1@114.152,136.852
NetD27_1: D27.1 R115.1 | length 4.9
  Top Layer w0.5: D27.1@102.726,141.424 102.726,137.61 R115.1@103.484,136.852
NetJ5_2: J5.2 R111.2 | length 9.2
  Top Layer w0.4: R111.2@175.636,13.054 176.602,12.088 J5.2@176.602,4.299
NetJ5_3: J5.3 R113.2 | length 9.1
  Top Layer w0.4: J5.3@177.252,4.299 177.252,12.13 R113.2@178.176,13.054
NetJ6_1: J6.1 RN1.2 U24.13 | length 26
  Top Layer w0.254: U24.13@193.916,39.012 195.838,39.012 196.132,38.718 RN1.2@196.132,36.344
  Bottom Layer w0.254: J6.1@192.176,17.98 191.9,18.256 191.9,21.95 192.176,22.226 196.132,26.182 v1(196.132,37.45)
NetJ6_2: J6.2 RN1.4 U24.12 | length 27.9
  Top Layer w0.254: U24.12@193.916,39.662 196.438,39.662 196.932,39.168 ; RN1.4@196.932,36.344 v1(196.932,37.45) ; v1(196.932,37.45) 196.932,39.168 ; v1(196.932,37.45) 196.932,39.168
  Bottom Layer w0.254: v1(196.932,37.45) 196.932,25.732 193.446,22.246 ; 193.446,22.246 J6.2@193.446,20.52 193.446,22.246
NetJ6_3: J6.3 RN1.6 U24.17 | length 32.4
  Top Layer w0.254: RN1.6@197.732,36.344 v1(197.732,38.994) 198.4,39.662 U24.17@200.616,39.662
  Bottom Layer w0.254: J6.3@194.65,18.046 J6.3@194.716,17.98 194.716,22.516 ; v1(197.732,38.994) 197.732,25.532 ; 194.716,22.516 197.732,25.532 ; 194.716,22.516 197.732,25.532